# Altium PCB Microproject_25.PcbDoc
Units mil, origin at the board's own origin, x right, y up, seen from the top; angles counter-clockwise.
Board outline 6000 x 4000 mil, 2 copper layers (Top Layer, Bottom Layer); 8 components, 9 nets, 80 pads, 0 vias.
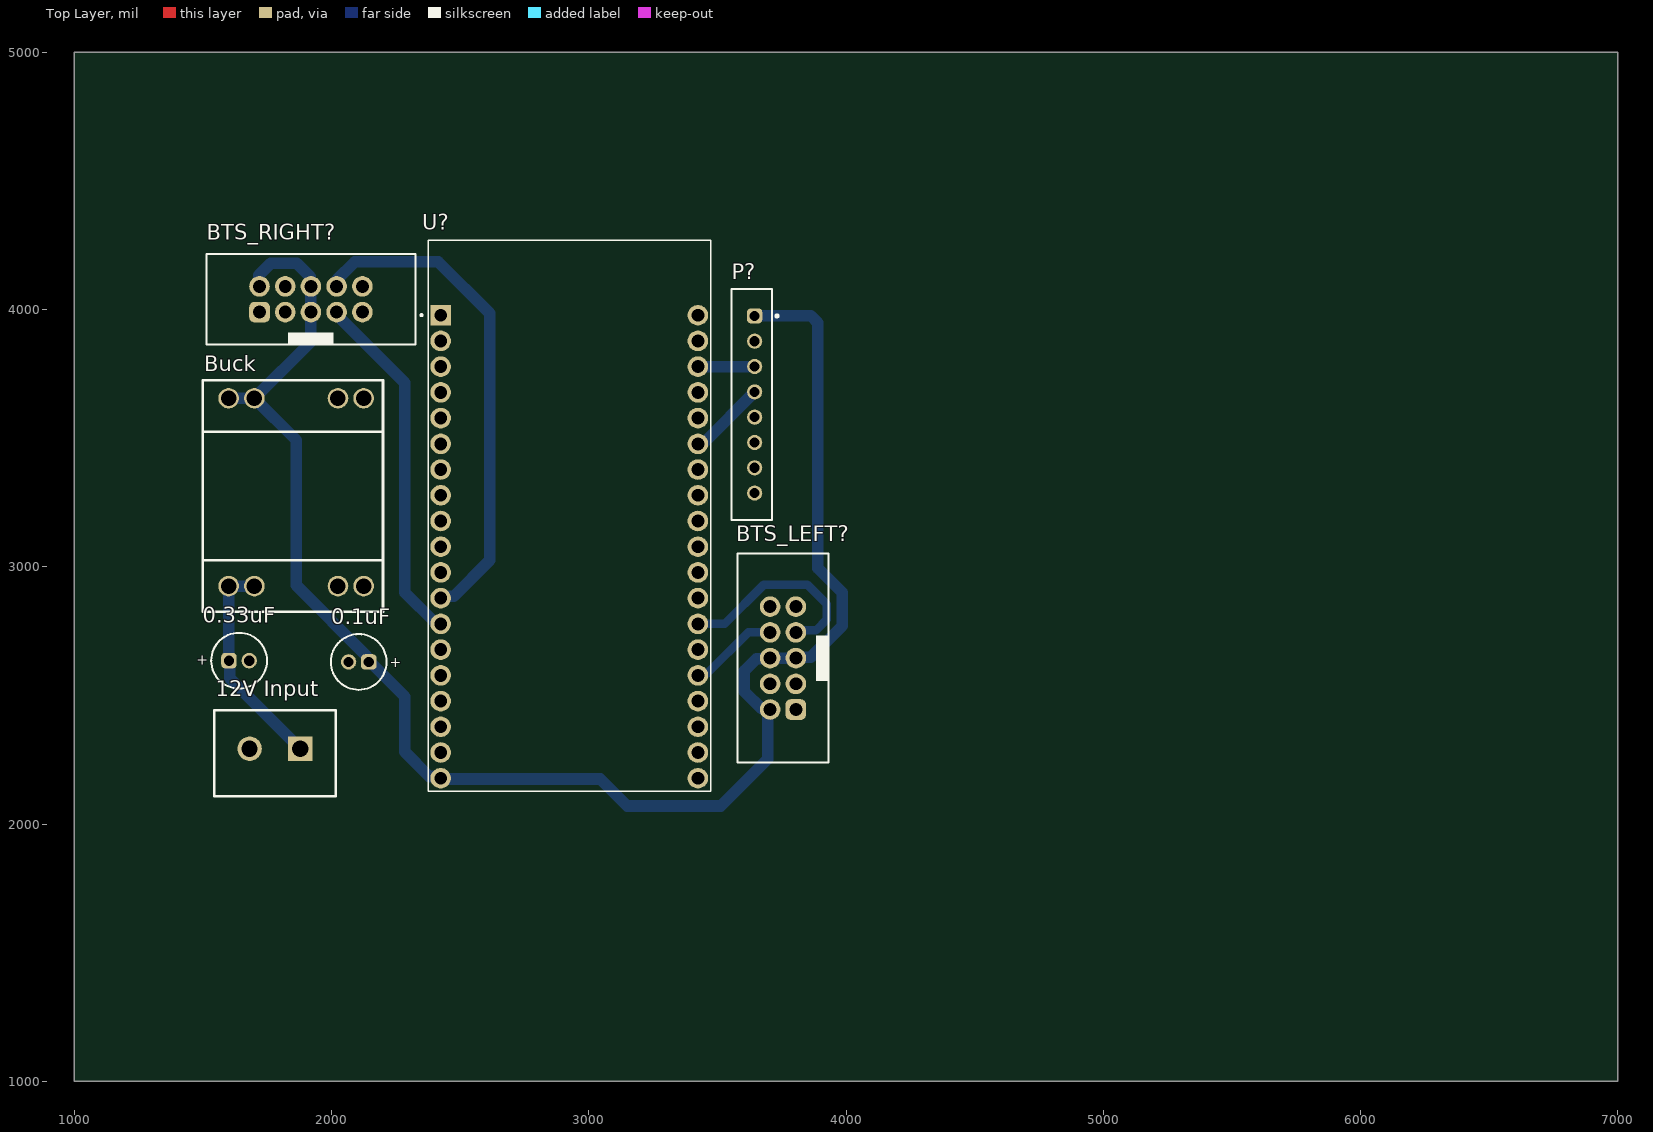
[diagram p0: Top Layer view]
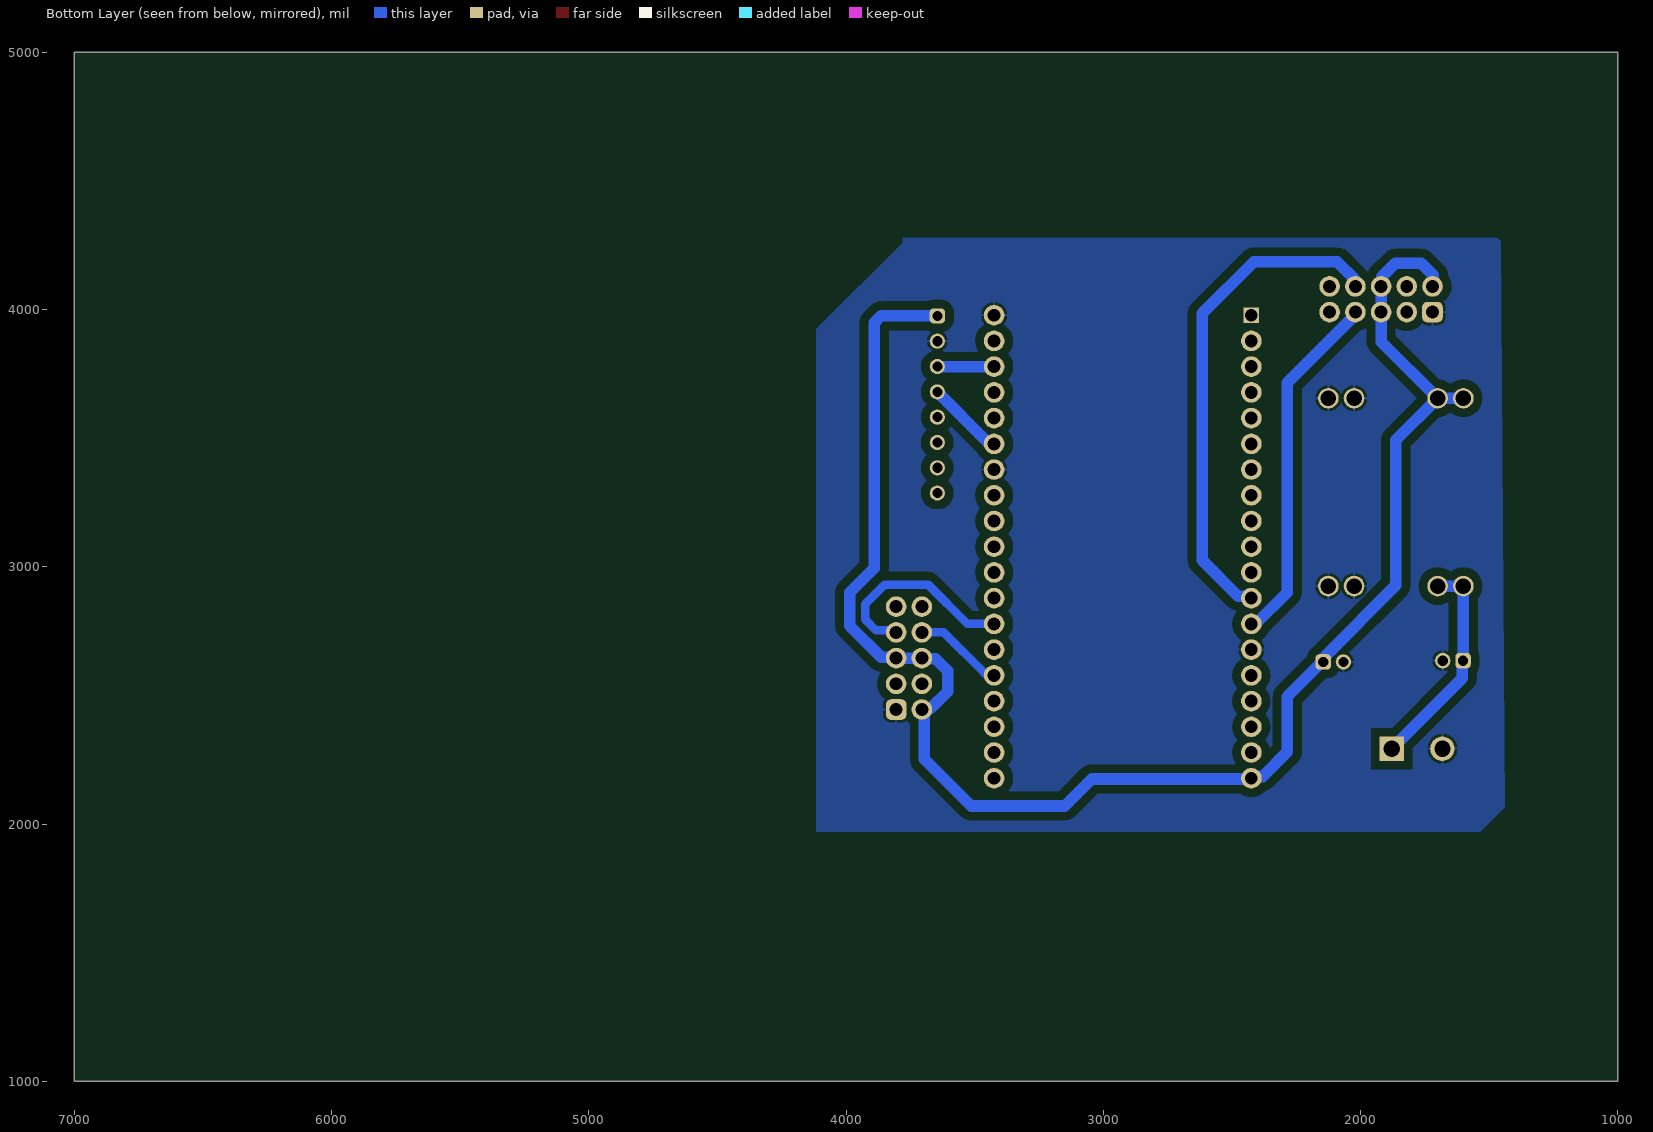
[diagram p1: Bottom Layer view, seen from below]
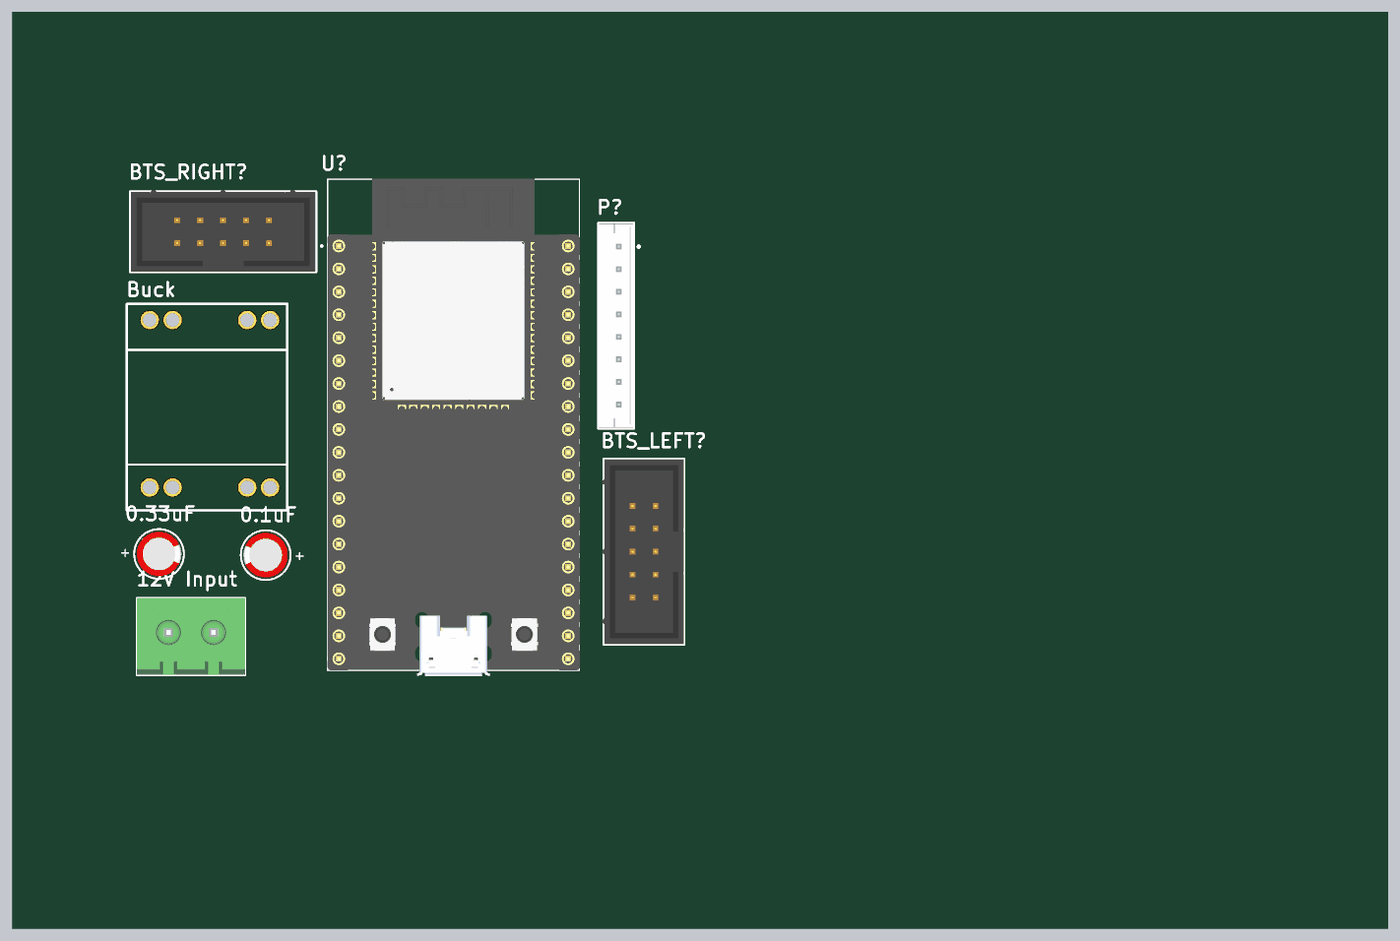
[diagram p2: 3D render of the assembled board from above, using the file's embedded part models]

## Layer stack, top to bottom
Top Solder: solder mask 0.4, Solder Resist, Dk 3.5
Top Layer: signal copper 1.4
Dielectric 1: dielectric 12.6, FR-4, Dk 4.8
Bottom Layer: signal copper 1.4
Bottom Solder: solder mask 0.4, Solder Resist, Dk 3.5

## Board outline
1000,1000 7000,1000 7000,5000 1000,5000

## Design rules (kind name [scope] priority, off if disabled: settings)
Clearance [All] p1: gap=10 ignorepadtopadclearanceinfootprint=FALSE except(0: Arc-Hole Track-Hole SMDPad-Hole THPad-Hole Via-Hole Fill-Hole Poly-Hole Region-Hole Text-Hole; 33: Arc-Fill Arc-Poly Arc-Region Track-Fill Track-Poly Track-Region SMDPad-Fill SMDPad-Poly SMDPad-Region THPad-Fill THPad-Poly THPad-Region Via-Fill Via-Poly Via-Region Fill-Fill Fill-Poly Fill-Region Poly-Poly Poly-Region Region-Region)
PolygonConnect [All] p1: connectstyle=Relief reliefconductorwidth=10 reliefentries=4 polygonreliefangle="90 Angle" airgapwidth=10
RoutingVias [All] p1: holewidth=28 width=50 viastyle="Through Hole" minholewidth=28 minwidth=50 maxholewidth=28 maxwidth=50
SolderMaskExpansion [All] p1: expansion=4 istentingtop=FALSE
Width [All] p1: maxlimit=45 minlimit=10 preferedwidth=33 toplayer_maxwidth=10 toplayer_prefwidth=10 minimp=50.000000 maximp=50.000000 favimp=50.000000
30 further rules are at their usual default settings.

## Components (designator, comment, footprint, x,y, rotation, side; value= is the part's Value field where it differs from the comment)
0.1uF "22uF" WCAP-ATG8_D5H11 2105.63,2630 r0 top
0.33uF "22uF" WCAP-ATG8_D5H11 1640.63,2635 r180 top
"12V Input" "691311700102" 691311700102 1780,2275 r180 top
BTS_LEFT? "612010235121" 612010235121 3755,2645 r90 top
BTS_RIGHT? "612010235121" 612010235121 1920,4040 r0 top
Buck "MP1584 Buck Convertor" MP1584 1600,2925 r90 top
P? "68800811622" 68800811622 3633.19,3630.79 r270 top
U? "ESP32-DEVKITC-32D" MODULE_ESP32-DEVKITC-32D 2924.37,3200 r0 top

## Footprints (in the part's own frame and the unit in brackets; to place one, negate y for a bottom-side part, rotate by r counter-clockwise, add the part's x,y. Pads: shape width x height; smd on the part's side, far side on the other; paste and mask are expansions set on the pad)
68800811622 [mm] "2.50mm ¡°J¡± Type Vertical Male Shrouded Header, 8p"
  rrect50% 1.5x1.5 hole 1: 1(-8.75,0.3)
  round 1.5 hole 1: 2(-6.25,0.3) 3(-3.75,0.3) 4(-1.25,0.3) 5(1.25,0.3) 6(3.75,0.3) 7(6.25,0.3) 8(8.75,0.3)
  silkscreen extent -11.4,-2 11.4,2.63, body extent -11.25,-1.9 11.25,1.9, height 6.03
612010235121 [mil] "10 pins, straight, gold plating"
  rrect50% 80x80 hole 50: 1(-200,-50)
  round 80 hole 50: 2(-200,50) 3(-100,-50) 4(-100,50) 5(0,-50) 6(0,50) 7(100,-50) 8(100,50) 9(200,-50) 10(200,50)
  silkscreen extent -406,-176 406,176, body extent -401,-173 401,183, height 358
691311700102 [mm] "5.00mm - PCB Vertical Closed - 02p"
  rect 2.4x2.4 hole 1.6: 1(-2.5,-0.45)
  round 2.4 hole 1.6: 2(2.5,-0.45)
  silkscreen extent -6,-4.25 6,4.25, body extent -6,-4.25 6,4.25, height 12.1
MODULE_ESP32-DEVKITC-32D [mil]
  rect 80x80 / inner round 61.42 / far side rect 61.42x61.42 hole 50: J2-1(-500,777.95)
  round 80 hole 50: J2-2(-500,677.95) J2-3(-500,577.95) J2-4(-500,477.95) J2-5(-500,377.95) J2-6(-500,277.95) J2-7(-500,177.95) J2-8(-500,77.95) J2-9(-500,-22.05) J2-10(-500,-122.05) J2-11(-500,-222.05) J2-12(-500,-322.05) J2-13(-500,-422.05) J2-14(-500,-522.05) J2-15(-500,-622.05) J2-16(-500,-722.05) J2-17(-500,-822.05) J2-18(-500,-922.05) J2-19(-500,-1022.05) J3-1(500,777.95) J3-2(500,677.95) J3-3(500,577.95) J3-4(500,477.95) J3-5(500,377.95) J3-6(500,277.95) J3-7(500,177.95) J3-8(500,77.95) J3-9(500,-22.05) J3-10(500,-122.05) J3-11(500,-222.05) J3-12(500,-322.05) J3-13(500,-422.05) J3-14(500,-522.05) J3-15(500,-622.05) J3-16(500,-722.05) J3-17(500,-822.05) J3-18(500,-922.05) J3-19(500,-1022.05)
  silkscreen extent -579,-1073 549,1069, body extent -550,-1098 550,1071, height 263
MP1584 [mil]
  round 80 hole 60: 1(0,0) 2(0,-100) 3(0,-425) 4(0,-525) 5(730,-525) 6(730,-425) 7(730,-100) 8(730,0)
  silkscreen extent -100,-600 800,100
WCAP-ATG8_D5H11 [mil] "Aluminum Electrolytic Capacitors, 5x11mm"
  rrect50% 60x60 hole 40: 1(39.37,0)
  round 60 hole 40: 2(-39.37,0)
  silkscreen extent -108,-108 108,108, body extent -98,-98 98,98, height 445

## Part data
0.1uF 0.33uF: library part 860010272001, "WCAP-ATG8 Aluminum Electrolytic Capacitor, Radial, THT, D5 x H11mm, 22uF, 10V", Capacitance Tolerance=+/-20%, Leakage Current=3uA, Manufacturer="Wurth Elektronik", Operating Temperature Max=85°C, Operating Temperature Min=-40°C, Rated Voltage (DC)=10V, Ripple Current=66mA, Capacitance=22uF, Category="Aluminum Electrolytic Capacitors", ComponentLink1Description="Website Link", ComponentLink1URL=https://www.we-online.com/redexpert/article/860010272001?ad, ComponentLink2Description="Datasheet Link", ComponentLink2URL=https://www.we-online.com/redexpert/spec/860010272001?ad, Diameter=5mm, Dissipation Factor=19%, Endurance=2000h, Height=11mm, Manufacturer Part Number=860010272001, Match Code=WCAP-ATG8, Mount="Through Hole", Packaging="Ammo Pack", Technical Reference=ATBC110220M010DSPA3B000
"12V Input": "WR-TBL Serie 3117 - 5.00 mm Close Vertical PCB Header, 02p", ComponentLink1Description=Manufacturer, ComponentLink1URL=http://www.we-online.de, ComponentLink2Description=Datasheet, ComponentLink2URL=http://katalog.we-online.de/em/datasheet/6913117001xx.pdf, Part Number=691311700102, Pin Number=02p, Pitch="5 mm", Published Date="Jan 2017", Publisher="Wurth Elektronik"
BTS_LEFT? BTS_RIGHT?: "WR-BHD Male Box Header, THT Straight, pitch 2.54mm, 2 row, 10 pin", Contact Resistance=20mOhm, Insulation Resistance=1000MOhm, Manufacturer="Wurth Elektronik", Operating Temperature Max=125°C, Operating Temperature Min=-40°C, Rated Current=3A, Withstanding Voltage=500V, Working Voltage=250V, Category="Wire-to-Board Connectors", ComponentLink1Description="Website Link", ComponentLink1URL=https://www.we-online.com/redexpert/article/612010235121?ad, ComponentLink2Description="Datasheet Link", ComponentLink2URL=https://www.we-online.com/redexpert/spec/612010235121?ad, Gender=Male, Height=9.05mm, Length=20.3mm, Manufacturer Part Number=612010235121, Match Code=WR-BHD, Mount="Through Hole", Number of Pins=10, Number of Rows=2, Orientation=Straight, Packaging=Tray, Pitch=2.54mm, Width=9.05mm
P?: "WR-WTB “J” Type THT Vertical Male Shrouded Header, pitch 2.5mm, 8pins", Contact Resistance=20mOhm, Manufacturer="Wurth Elektronik", Operating Temperature Max=85°C, Operating Temperature Min=-25°C, Rated Current=3A, Withstanding Voltage=800VAC, Working Voltage=250VAC, Category="Wire-to-Board Connectors", ComponentLink1Description="Website Link", ComponentLink1URL=https://www.we-online.com/redexpert/article/68800811622?ad, ComponentLink2Description="Datasheet Link", ComponentLink2URL=https://www.we-online.com/redexpert/spec/68800811622?ad, Gender=Male, Height=6mm, Length=22.5mm, Manufacturer Part Number=68800811622, Match Code=WR-WTB, Mount="Through Hole", Number of Pins=8, Number of Rows=1, Orientation=Vertical, Packaging=Bag, Pitch=2.5mm, Width=3.8mm
U?: "WiFi Development Tools (802.11) ESP32 General Development Kit, ESP32-WROOM-32D on the board", Package=None, Check_prices=https://www.snapeda.com/parts/ESP32-DEVKITC-32D/Espressif+Systems/view-part/?ref=eda, MF="Espressif Systems", MP=ESP32-DEVKITC-32D, SnapEDA_Link=https://www.snapeda.com/parts/ESP32-DEVKITC-32D/Espressif+Systems/view-part/?ref=snap

## Nets (pads, with @x,y where several pads share a name; then routed paths per layer and width w, separated by ;. In a path a pad name is that pad's centre, name@x,y a point inside that pad or via, vN(x,y) a via of type N, cw(c..) or ccw(c..) an arc to the next point about the centre after c; other vN are vias at no path point)
GND: 0.1uF.2 0.33uF.2 "12V Input.2" BTS_LEFT?.1 BTS_RIGHT?.1 Buck.3 Buck.4 Buck.5 Buck.6 P?.2 U?.J2-14 U?.J3-1 U?.J3-7
Net0.33uF_1: 0.33uF.1 "12V Input.1" Buck.1 Buck.2 | length 847.6
  Bottom Layer w45: Buck.2 Buck.1 1600.63,2924.37 1600.63,2635.63 0.33uF.1 1604.35,2631.91 1604.35,2566.79 1878.43,2292.72
PROTECTED_5V: 0.1uF.1 BTS_LEFT?.2 BTS_LEFT?.5 BTS_LEFT?.6 BTS_RIGHT?.2 BTS_RIGHT?.5 BTS_RIGHT?.6 Buck.7 Buck.8 P?.1 U?.J2-19 | length 6478.3
  Bottom Layer w45: Buck.8 Buck.7 ; BTS_RIGHT?.2 1717.16,4092.84 1717.16,4133.52 1763.64,4180 1865,4180 1917.16,4127.84 1917.16,4092.84 BTS_RIGHT?.6 BTS_RIGHT?.5 1920,3875 Buck.7 ; 0.1uF.1@2137.5,2637.5 2137.5,2652.5 1862.46,2927.54 1862.46,3492.54 Buck.7 ; 0.1uF.1 2150,2630 2150,2625 2152.5,2622.5 2157.5,2622.5 2284.66,2495.34 2284.66,2280.34 2380.35,2184.65 2417.67,2184.65 2427.32,2175 3045,2175 3150,2070 3513.64,2070 3695,2251.36 3695,2430.98 3705,2440.98 BTS_LEFT?.2 3702.16,2447.84 3672.16,2447.84 3605,2515 3605,2595 3652.16,2642.16 3702.16,2642.16 BTS_LEFT?.6 BTS_LEFT?.5@3814.47,2645 ; P?.1 3863.64,3975.28 3890,3948.92 3890,2995 3985,2900 3985,2770 3863.51,2648.51 3808.51,2648.51 BTS_LEFT?.5
PWM_LB: BTS_LEFT?.8 U?.J3-15 | length 349.8
  Bottom Layer w33: U?.J3-15 3433.36,2586.95 3461.95,2586.95 3620,2745 BTS_LEFT?.8
PWM_LF: BTS_LEFT?.7 U?.J3-13 | length 795.4
  Bottom Layer w33: U?.J3-13 3527.95,2777.95 3680,2930 3850,2930 3925,2855 3925,2795 3882.79,2752.79 3812.79,2752.79 BTS_LEFT?.7
PWM_RB: BTS_RIGHT?.8 U?.J2-12 | length 1943.4
  Bottom Layer w45: BTS_RIGHT?.8 2022.84,4092.84 2022.84,4117.84 2090,4185 2415,4185 2615,3985 2615,3025 2474.65,2884.65 2431.07,2884.65 U?.J2-12
PWM_RF: BTS_RIGHT?.7 U?.J2-13 | length 1389.7
  Bottom Layer w45: BTS_RIGHT?.7 2020,3980.53 2037.5,3963.03 2037.5,3962.5 2285,3715 2285,2900 2403.91,2781.09 2421.23,2781.09 U?.J2-13
SCL: P?.3 U?.J3-3 | length 220.8
  Bottom Layer w45: U?.J3-3 3424.61,3778.19 3644.76,3778.19 P?.3
SDA: P?.4 U?.J3-6 | length 304.3
  Bottom Layer w45: U?.J3-6 3431.07,3484.65 3449.65,3484.65 P?.4
pads on no net: BTS_LEFT?.3 BTS_LEFT?.4 BTS_LEFT?.9 BTS_LEFT?.10 BTS_RIGHT?.3 BTS_RIGHT?.4 BTS_RIGHT?.9 BTS_RIGHT?.10 P?.5 P?.6 P?.7 P?.8 U?.J2-1 U?.J2-2 U?.J2-3 U?.J2-4 U?.J2-5 U?.J2-6 U?.J2-7 U?.J2-8 U?.J2-9 U?.J2-10 U?.J2-11 U?.J2-15 U?.J2-16 U?.J2-17 U?.J2-18 U?.J3-2 U?.J3-4 U?.J3-5 U?.J3-8 U?.J3-9 U?.J3-10 U?.J3-11 U?.J3-12 U?.J3-14 U?.J3-16 U?.J3-17 U?.J3-18 U?.J3-19

## Polygon pours and split planes (outlines as drawn)
GND on Bottom Layer "GND_L02_P000" (solid, remove dead copper, pour order 0): 1455,4265 1470,4280 3780,4280 3780,4260 4115,3925 4115,1970 1535,1970 1440,2065

## Text inside footprints (layer, text, board x,y; h text height)
0.1uF: Top Overlay "+" at 2225.71,2610.32 h39.37
0.33uF: Top Overlay "+" at 1520.55,2654.68 h39.37 r180